# Altium PCB StepperMotorController.PcbDoc
Units mm, origin at the board's own origin, x right, y up, seen from the top; angles counter-clockwise.
Board outline 71.3 x 72.3 mm, 2 copper layers (Top Layer, Bottom Layer); 6 components, 26 nets, 99 pads, 6 vias.
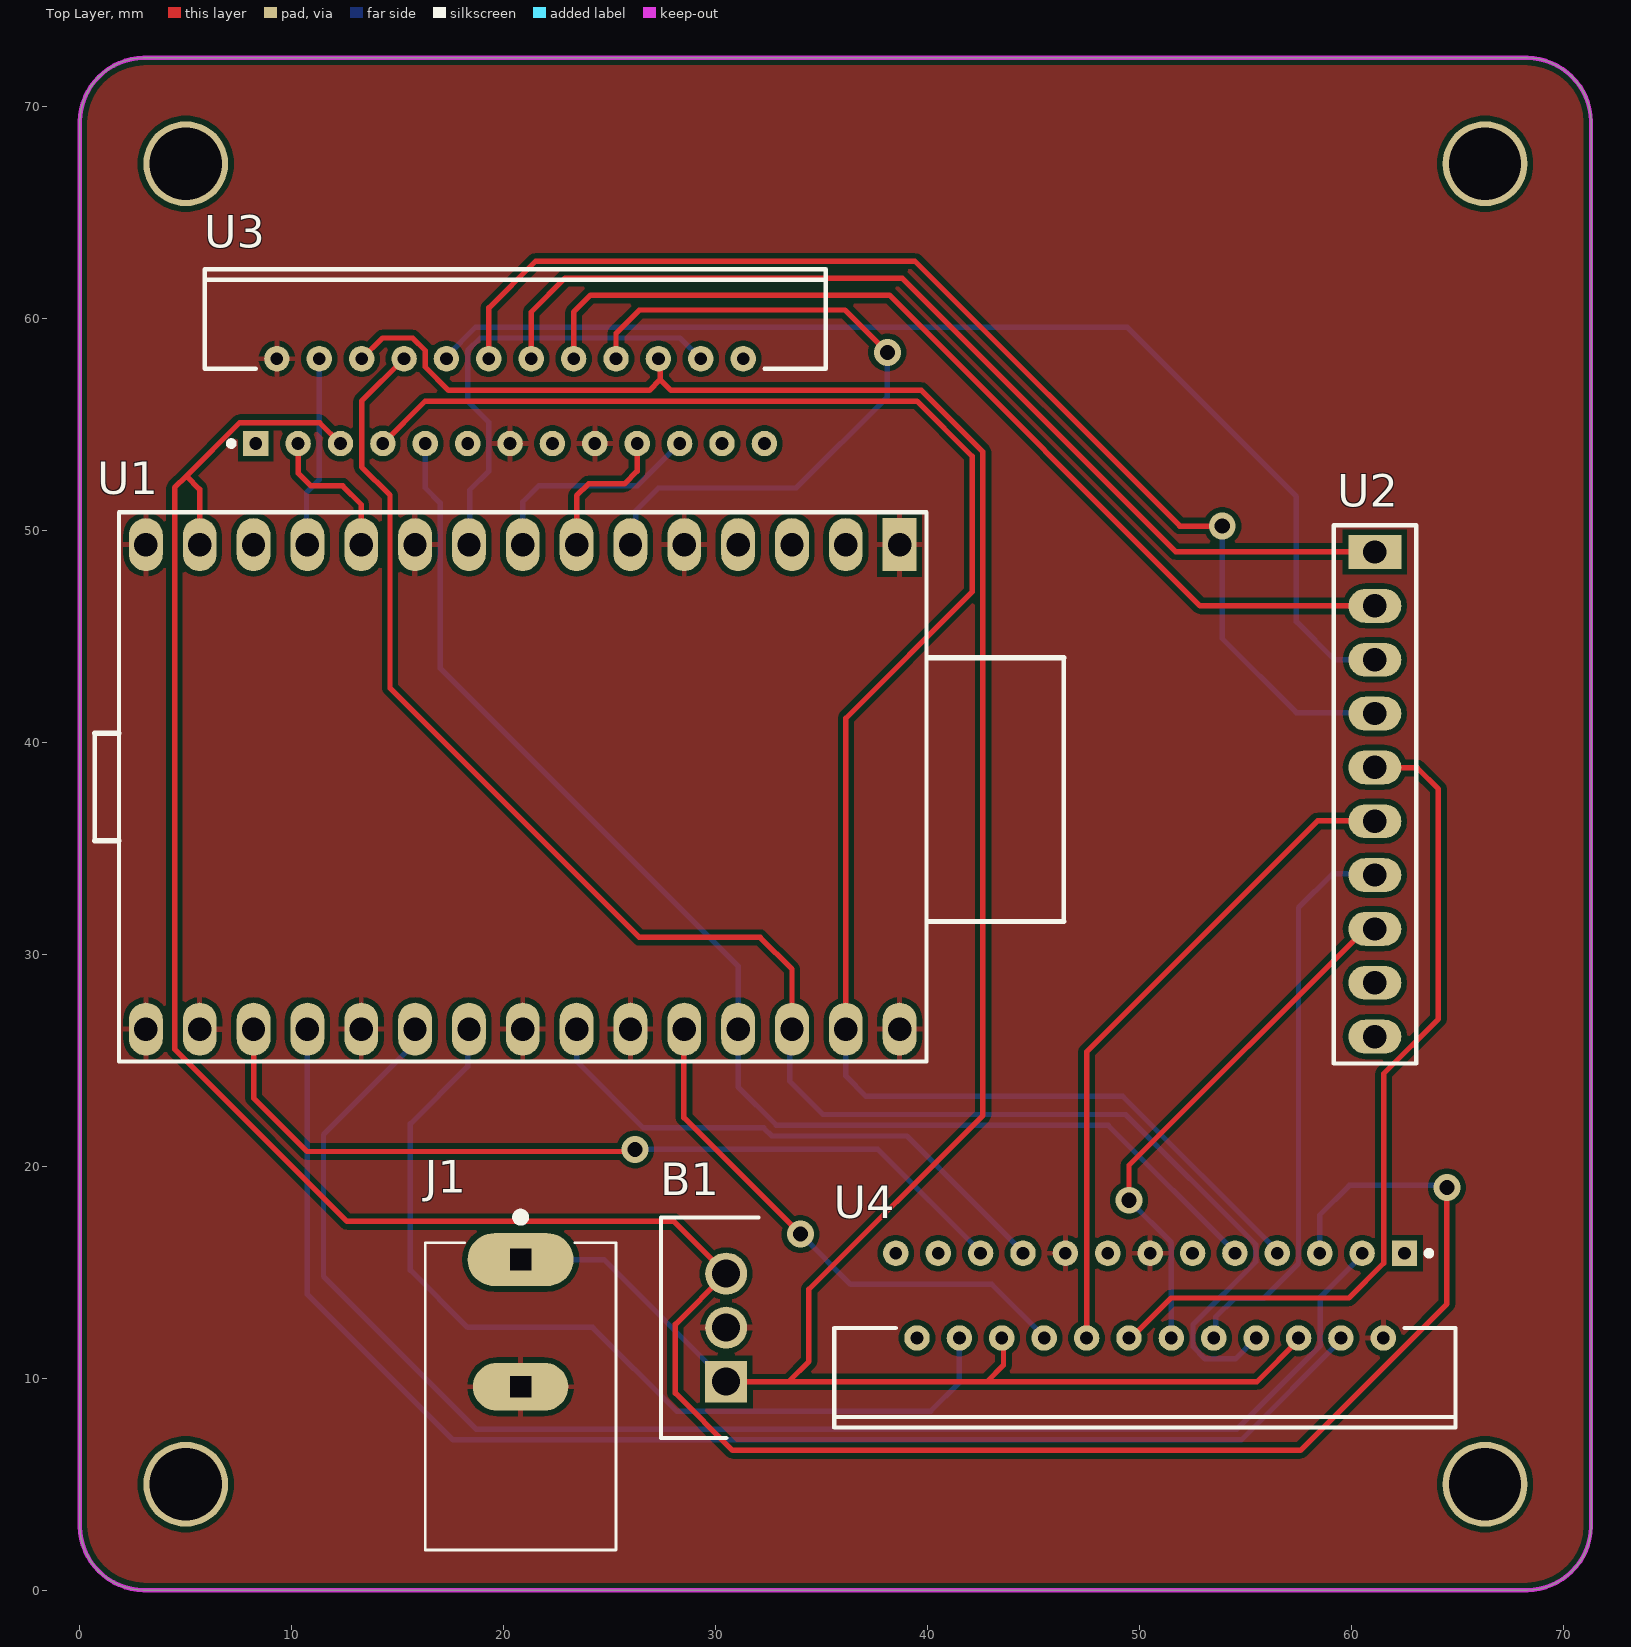
[diagram p0: Top Layer view]
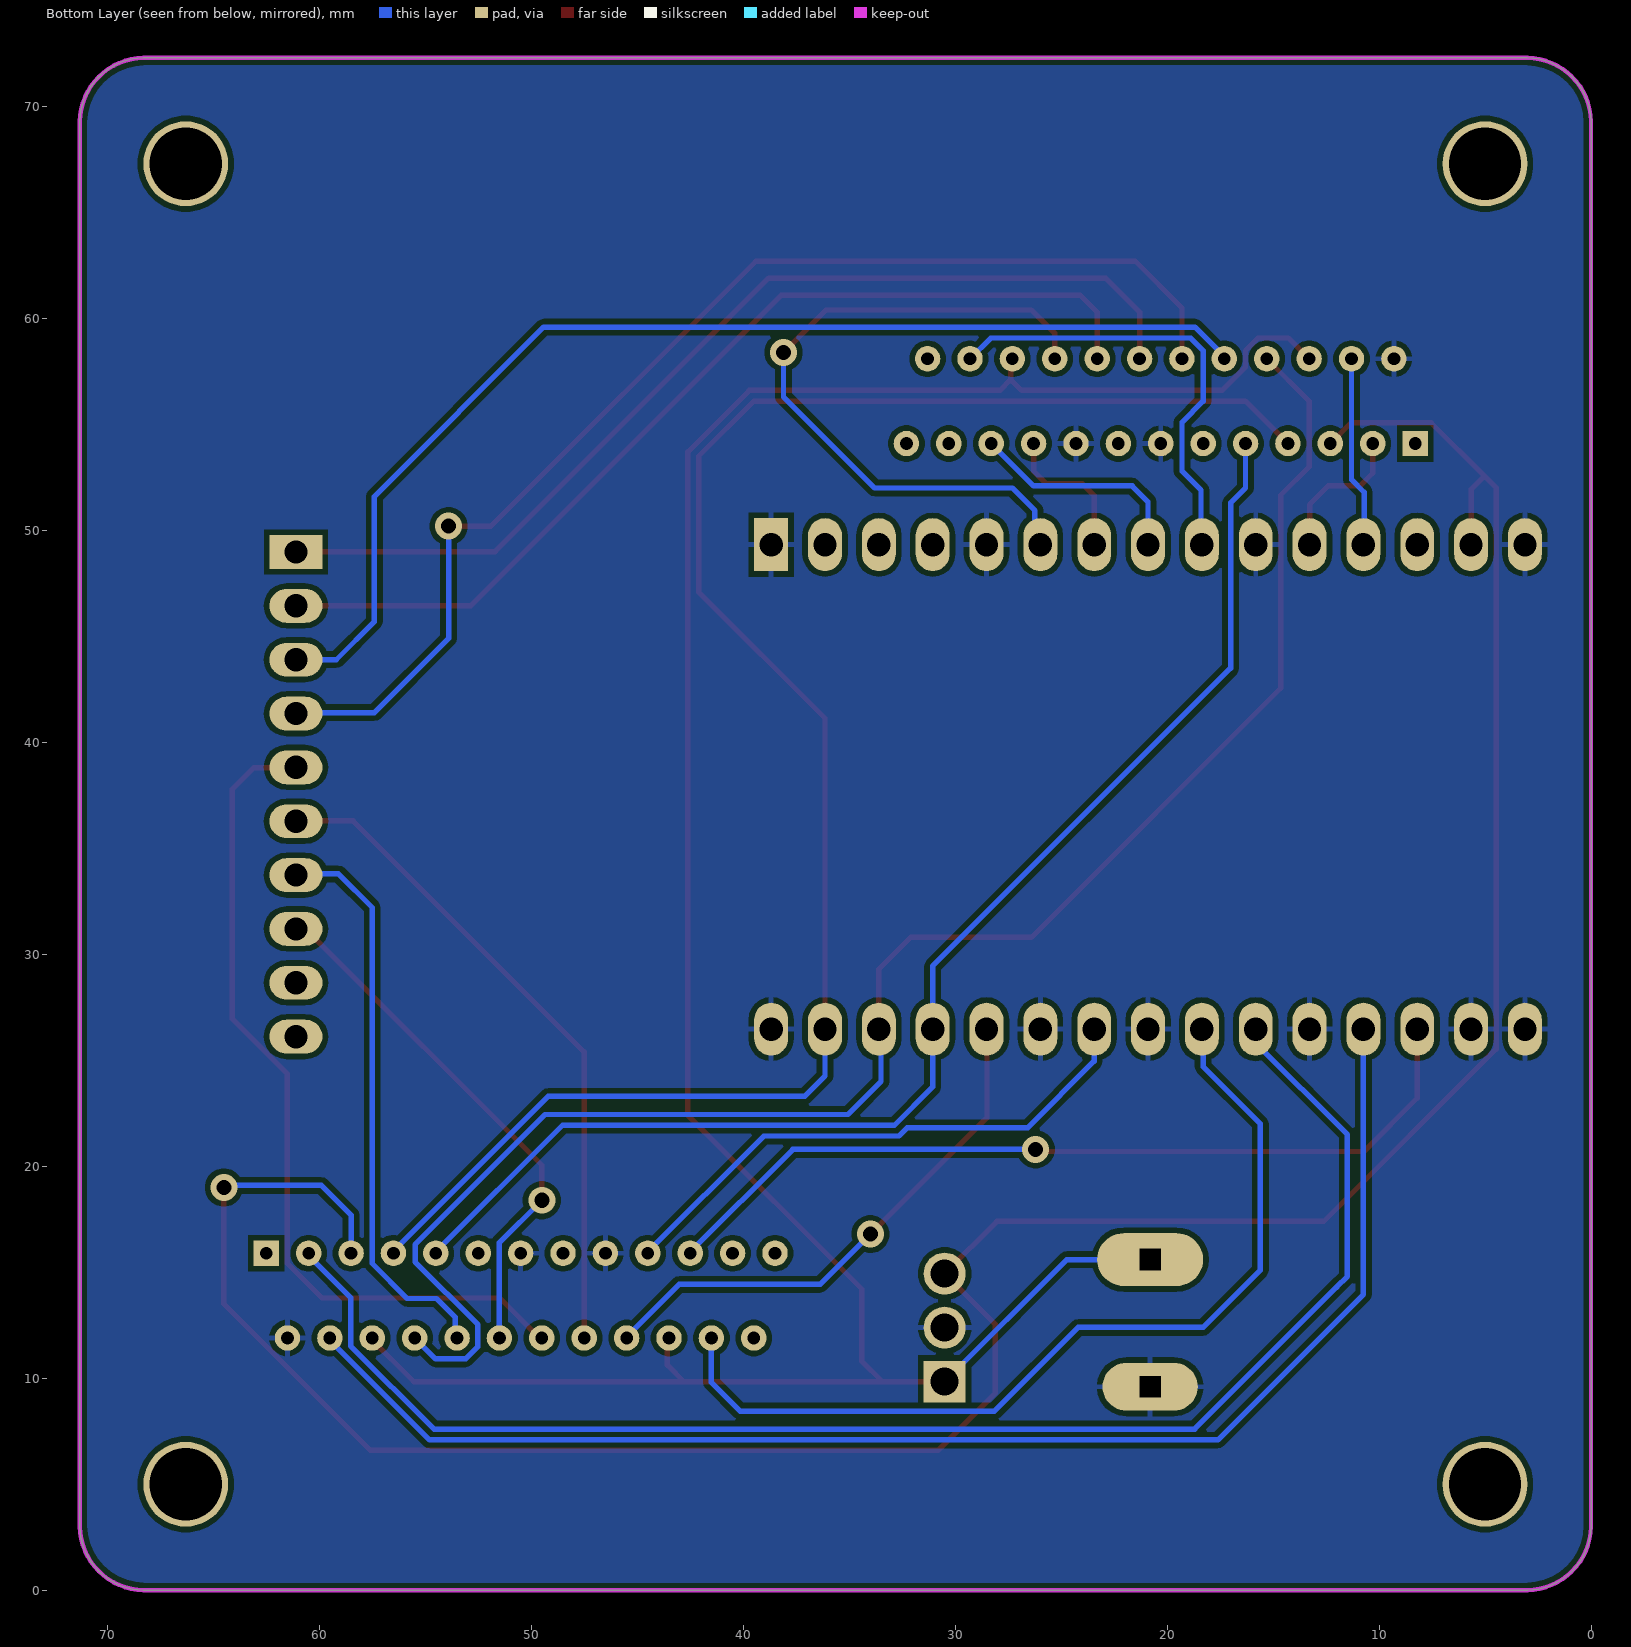
[diagram p1: Bottom Layer view, seen from below]
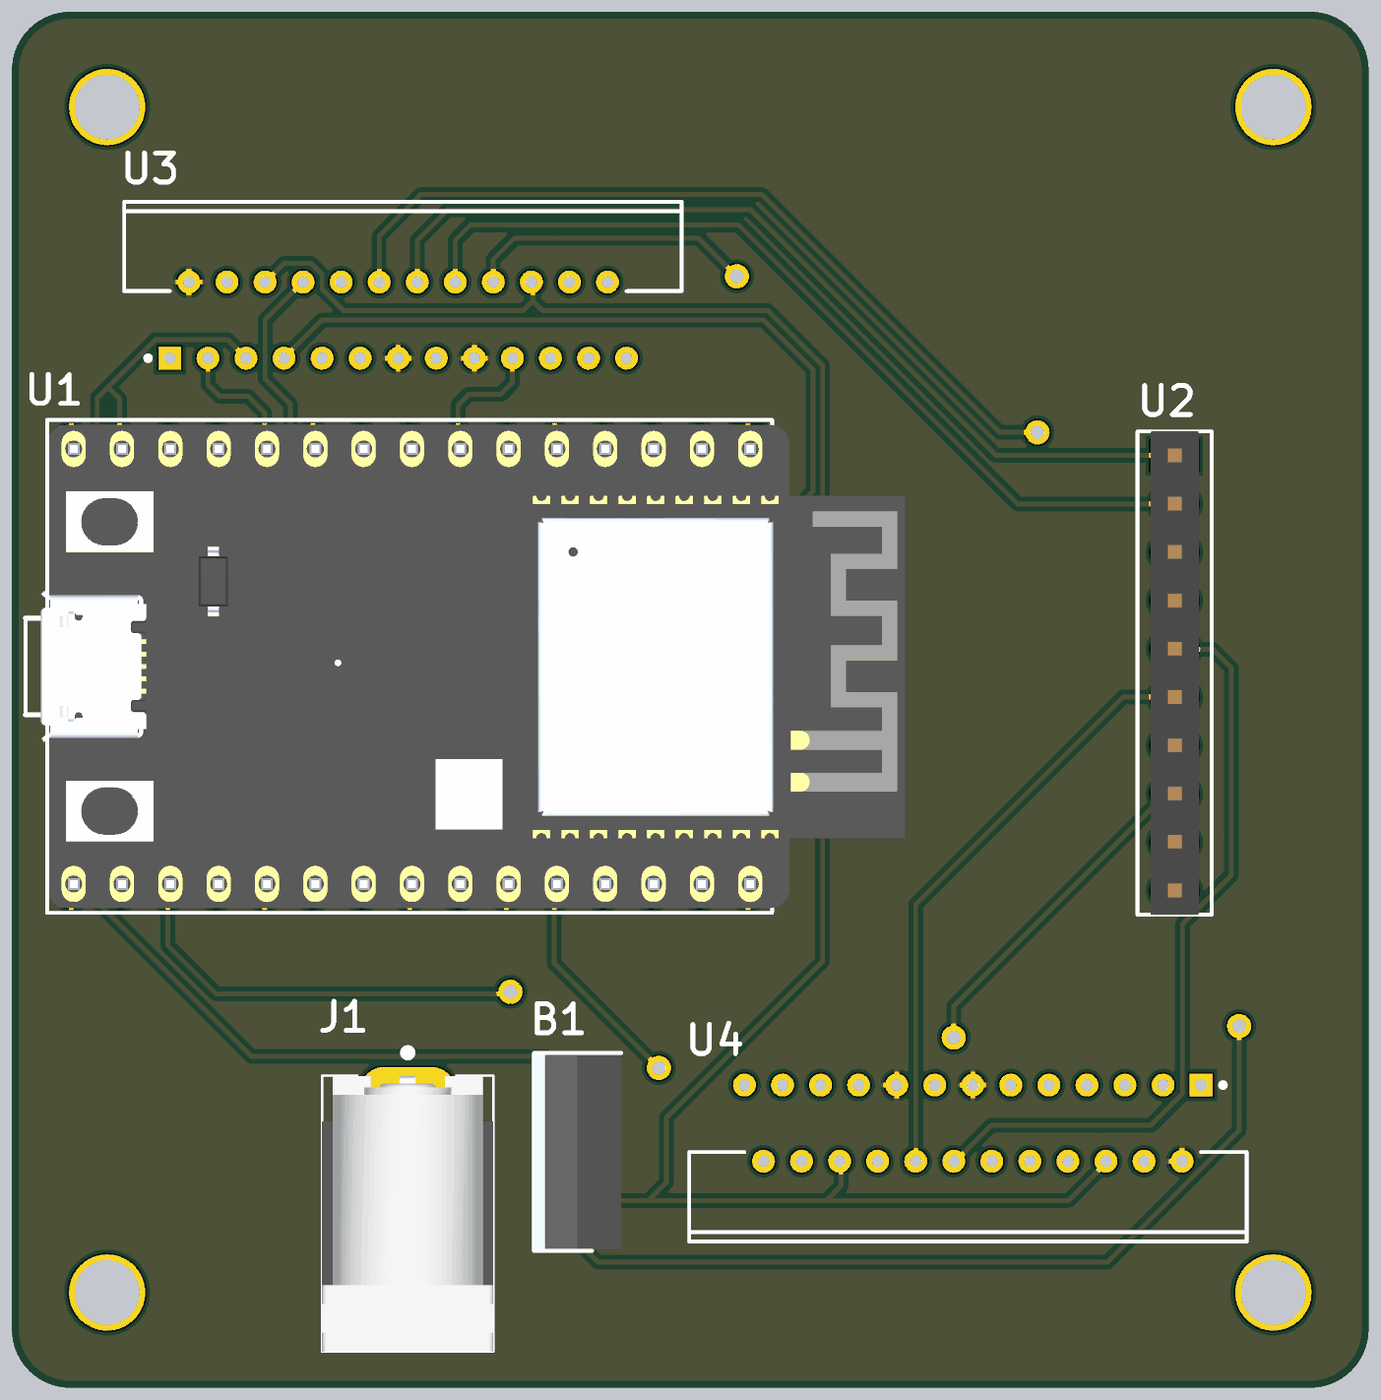
[diagram p2: 3D render of the assembled board from above, using the file's embedded part models]

## Layer stack, top to bottom
Top Solder: solder mask 0.0102, Solder Resist, Dk 3.5
Top Layer: signal copper 0.0356
Dielectric 1: dielectric 0.32, FR-4, Dk 4.8
Bottom Layer: signal copper 0.0356
Bottom Solder: solder mask 0.0102, Solder Resist, Dk 3.5

## Board outline
0,3 ccw(c3.067,3.067) 3,0 68.3,0 ccw(c68.233,3.067) 71.3,3 71.3,69.3 ccw(c68.233,69.233) 68.3,72.3 3,72.3 ccw(c3.067,69.233) 0,69.3

## Design rules (kind name [scope] priority, off if disabled: settings)
Clearance [All] p1: gap=0.254 ignorepadtopadclearanceinfootprint=FALSE
PolygonConnect [All] p1: connectstyle=Relief reliefconductorwidth=0.254 reliefentries=4 polygonreliefangle="90 Angle" airgapwidth=0.254
RoutingVias [All] p1: holewidth=0.711 width=1.27 viastyle="Through Hole" minholewidth=0.711 minwidth=1.27 maxholewidth=0.711 maxwidth=1.27
SolderMaskExpansion [All] p1: expansion=0.102 istentingtop=FALSE
Width [All] p1: maxlimit=0.254 minlimit=0.254 preferedwidth=0.254
30 further rules are at their usual default settings.

## Components (designator, comment, footprint, x,y, rotation, side; value= is the part's Value field where it differs from the comment)
B1 "L7805CV" TO255P460X1020X2008-3P 30.496,9.837 r90 top
J1 "PJ-037A" CUI_PJ-037A 20.8,15.6 r270 top
U1 "ESP32" ESP32 20.9,37.9 r270 top
U2 "Stackable Pin Bus" STACKABLE_PIN_BUS 61.1,37.55 r0 top
U3 "TB6600HG" TOSH-HZIP25-1.00F-25 20.55,56.1 r90 top
U4 "TB6600HG" TOSH-HZIP25-1.00F-25 50.25,13.9 r270 top

## Footprints (in the part's own frame and the unit in brackets; to place one, negate y for a bottom-side part, rotate by r counter-clockwise, add the part's x,y. Pads: shape width x height; smd on the part's side, far side on the other; paste and mask are expansions set on the pad)
CUI_PJ-037A [mm]
  oval 2.5x5 hole 1 square: 1(0,0)
  oval 2.25x4.5 hole 1 square: 2(6,0)
  silkscreen extent -2.2,-4.5 13.7,4.5, body extent -0.78,-4.5 13.72,4.5, height 11
ESP32 [mm]
  rect 2.5x1.6 hole 1.1: 1(-11.43,17.78)
  oval 2.5x1.6 hole 1.1: 2(-11.43,15.24) 3(-11.43,12.7) 4(-11.43,10.16) 5(-11.43,7.62) 6(-11.43,5.08) 7(-11.43,2.54) 8(-11.43,0) 9(-11.43,-2.54) 10(-11.43,-5.08) 11(-11.43,-7.62) 12(-11.43,-10.16) 13(-11.43,-12.7) 14(-11.43,-15.24) 15(-11.43,-17.78) 16(11.43,-17.78) 17(11.43,-15.24) 18(11.43,-12.7) 19(11.43,-10.16) 20(11.43,-7.62) 21(11.43,-5.08) 22(11.43,-2.54) 23(11.43,0) 24(11.43,2.54) 25(11.43,5.08) 26(11.43,7.62) 27(11.43,10.16) 28(11.43,12.7) 29(11.43,15.24) 30(11.43,17.78)
  silkscreen extent -12.95,-20.19 12.95,25.53, body extent -12.7,-19.39 12.7,26.03, height 7.49
STACKABLE_PIN_BUS [mm]
  rect 2.5x1.6 hole 1.1: 1(0,11.43)
  oval 2.5x1.6 hole 1.1: 2(0,8.89) 3(0,6.35) 4(0,3.81) 5(0,1.27) 6(0,-1.27) 7(0,-3.81) 8(0,-6.35) 9(0,-8.89) 10(0,-11.43)
  silkscreen extent -1.94,-12.7 1.95,12.7, body extent -1.25,-12.69 1.29,12.71, height 8
TO255P460X1020X2008-3P [mm]
  rect 1.98x1.98 / inner round 1.98 / far side rect 1.98x1.98 hole 1.32: 1(0,0)
  round 1.98 hole 1.32: 2(2.55,0) 3(5.1,0)
  silkscreen extent -2.65,-1.53 7.75,3.07, body extent -2.55,-1.53 7.65,3.07, height 19.22
TOSH-HZIP25-1.00F-25 [mm] "FM, 25-Leads, Body 4.5x29.3mm, Pitch 1mm"
  rect 1.2x1.2 hole 0.6: 1(-2,12.25)
  round 1.2 hole 0.6: 2(2,11.25) 3(-2,10.25) 4(2,9.25) 5(-2,8.25) 6(2,7.25) 7(-2,6.25) 8(2,5.25) 9(-2,4.25) 10(2,3.25) 11(-2,2.25) 12(2,1.25) 13(-2,0.25) 14(2,-0.75) 15(-2,-1.75) 16(2,-2.75) 17(-2,-3.75) 18(2,-4.75) 19(-2,-5.75) 20(2,-6.75) 21(-2,-7.75) 22(2,-8.75) 23(-2,-9.75) 24(2,-10.75) 25(-2,-11.75)
  silkscreen extent -2.12,-14.65 6.23,14.65, body extent -2.21,-14.65 6.2,14.65, height 19.37

## Part data
B1: "Linear voltage regulator,L7805CV 5V 1.5A STMicroelectronics L7805CV, Single Linear Voltage Regulator, 1.5A 5 V, 3-Pin TO-220", Manufacturer_Name=STMicroelectronics, Mouser Part Number=511-L7805CV, Datasheet Link=http://www.st.com/web/en/resource/technical/document/datasheet/CD00000444.pdf, Geometry.Height=4.6mm, Manufacturer_Part_Number=L7805CV, Mouser Price/Stock=https://www.mouser.co.uk/ProductDetail/STMicroelectronics/L7805CV?qs=9NrABl3fj%2FqplZAHiYUxWg%3D%3D
J1: "2.0 mm Center Pin, 2.5 A, Right Angle, Through Hole, Dc Power Jack Connector", Package=None, Availability=Unavailable, MP=PJ-037A, Price=None
U1: library part ESP32-C3-DEVKITC-02, Manufacturer="Espressif Systems", Supplier Part Number=1965-ESP32-C3-DEVKITC-02-ND, Category="RF Semiconductors and Devices", Manufacturer Part Number=ESP32-C3-DEVKITC-02, Pricing="1=8 (USD)", RoHS=No, Stock=1074, Supplier=Digikey
U2: library part "Barramento Empilhável", "10 pinos, Passo 2.54mm, Dimensões da barra 26x2x8mm"
U3: library part CMP-0695-00001-1, "PWM Chopper-Type Bipolar Stepping Motor Driver IC, 5.5 V Input Voltage, 4.5 A Output Current, -30 to 85 degC, 25-Pin FM (HZIP25-1.00F)", Clock Frequency (Max.)="200 KHz", Manufacturer=Toshiba, Operating Temperature="-30 to 85 degC", OSC Frequency="2.0 to 6.0 MHz", Output Current (Typ.)="4.5 A", Power Supply Voltage (Max.)="45 V", ComponentLink1Description="Manufacturer URL", ComponentLink1URL=http://www.toshiba-components.com/, ComponentLink2Description=Datasheet, ComponentLink2URL=http://www.toshiba-components.com/docs/linear/TB6600HG_en_datasheet.pdf, DatasheetVersion=Oct-13, Mounting Technology="Through Hole", PackageDescription="25-Pin HZIP25-P-1.00F, Body 4.5 x 29.3 mm, Pitch 1 mm", PackageReference=HZIP25-P-1.00F-25, PartNumber=TB6600HG, VIN (Typ.)="5.5 V"
U4: library part TB550HD, "PWM Chopper-Type Bipolar Stepping Motor Driver IC, 5.5 V Input Voltage, 4.5 A Output Current, -30 to 85 degC, 25-Pin FM (HZIP25-1.00F)", Clock Frequency (Max.)="200 KHz", Manufacturer=Toshiba, Operating Temperature="-30 to 85 degC", OSC Frequency="2.0 to 6.0 MHz", Output Current (Typ.)="4.5 A", Power Supply Voltage (Max.)="45 V", ComponentLink1Description="Manufacturer URL", ComponentLink1URL=http://www.toshiba-components.com/, ComponentLink2Description=Datasheet, ComponentLink2URL=http://www.toshiba-components.com/docs/linear/TB6600HG_en_datasheet.pdf, DatasheetVersion=Oct-13, Mounting Technology="Through Hole", PackageDescription="25-Pin HZIP25-P-1.00F, Body 4.5 x 29.3 mm, Pitch 1 mm", PackageReference=HZIP25-P-1.00F-25, PartNumber=TB6600HG, VIN (Typ.)="5.5 V"

## Free pads (board coordinates)
  round 4 hole 3.4: 3(5,5) 3(5,67.3) 3(66.3,5) 3(66.3,67.3)

## Via types
v1: diameter 1.27, hole 0.711, Top Layer to Bottom Layer, 6 vias

## Nets (pads, with @x,y where several pads share a name; then routed paths per layer and width w, separated by ;. In a path a pad name is that pad's centre, name@x,y a point inside that pad or via, vN(x,y) a via of type N, cw(c..) or ccw(c..) an arc to the next point about the centre after c; other vN are vias at no path point)
+5: B1.3 U1.14 U3.5 U4.5 | length 130.8
  Top Layer w0.254: U1.14 5.66,51.94 5.031,52.569 ; U3.5 11.319,55.081 7.542,55.081 5.031,52.569 ; v1(64.5,19) 64.5,13.513 57.587,6.6 30.8,6.6 28.1,9.3 28.1,12.541 B1.3 28.033,17.4 12.61,17.4 4.479,25.531 4.479,52.018 5.031,52.569
  Bottom Layer w0.254: U4.5 58.5,17.7 59.9,19.1 64.4,19.1 v1(64.5,19)
+12: B1.1 J1.1 U3.6 U3.20 U4.6 U4.20 | length 123.9
  Top Layer w0.254: U3.6 14.281,59.081 15.706,59.081 16.3,58.487 16.3,57.713 17.405,56.608 26.87,56.608 27.381,57.119 ; U3.20 27.381,58.019 27.381,57.119 ; B1.1 33.437,9.837 ; U4.20@43.578,11.879 43.578,10.622 42.793,9.837 ; U4.6@57.578,11.879 55.536,9.837 42.793,9.837 ; 27.381,57.119 27.892,56.608 39.71,56.608 42.608,53.71 42.608,22.408 34.4,14.2 34.4,10.8 33.437,9.837 ; 33.437,9.837 42.793,9.837
  Bottom Layer w0.254: J1.1 24.733,15.6 B1.1
CLK1: U1.8 U3.21 | length 10.6
  Bottom Layer w0.254: U1.8 20.9,51.351 21.649,52.1 26.3,52.1 U3.21
CLK2: U1.18 U4.21 | length 40.8
  Top Layer w0.254: U1.18 8.2,23.218 10.718,20.7 26.1,20.7 v1(26.2,20.8)
  Bottom Layer w0.254: v1(26.2,20.8) 37.657,20.8 U4.21@42.578,15.879
CW/CCW1: U1.9 U3.22 | length 21.6
  Bottom Layer w0.254: U1.9 18.4,49.37 18.4,51.9 19.3,52.8 19.3,55.1 18.3,56.1 18.3,58.487 18.894,59.081 28.319,59.081 U3.22
CW/CCW2: U1.22 U4.22 | length 44
  Bottom Layer w0.254: U1.22@18.5,26.33 U1.22 18.3,26.41 18.3,24.7 15.6,22 15.6,15.1 18.3,12.4 24.2,12.4 28.152,8.448 40.148,8.448 41.5,9.8 U4.22
ENABLE1: U1.6 U3.18 | length 33.2
  Top Layer w0.254: U3.18 25.3,59.3 26.4,60.4 36.1,60.4 v1(38.1,58.4) ; U1.6 U1.6@26.238,49.588
  Bottom Layer w0.254: U1.6@26.238,49.588 26.238,50.938 27.3,52 33.8,52 38.1,56.3 v1(38.1,58.4)
ENABLE2: U1.26 U4.18 | length 25.6
  Top Layer w0.254: U1.26 28.5,26.45 28.5,22.3 v1(34,16.8)
  Bottom Layer w0.254: v1(34,16.8) 36.37,14.43 43.027,14.43 U4.18@45.578,11.879
GND: B1.2 J1.2 U1.1 U1.5 U1.10 U1.15 U1.16 U1.17 U1.20 U1.23 U1.25 U1.30 U3.2 U3.13 U3.17 U4.2 U4.13 U4.17
LATCH1: U1.12 U3.4 | length 9
  Bottom Layer w0.254: U1.12 10.7,49.37 10.7,51.8 11.3,52.4 U3.4
LATCH2: U1.19 U4.4 | length 66.2
  Bottom Layer w0.254: U1.19 10.74,13.96 17.608,7.092 54.798,7.092 59.578,11.872 U4.4@59.578,11.879
M1: U1.29 U3.7 U4.7 | length 85.4
  Top Layer w0.254: U3.7 16.3,56.1 39.5,56.1 42.1,53.5 42.1,47.1 36.14,41.14 U1.29
  Bottom Layer w0.254: U1.29 36.14,24.26 37.1,23.3 49.206,23.3 56.578,15.928 U4.7@56.578,15.879
M2: U1.28 U3.8 U4.8 | length 81.6
  Top Layer w0.254: U3.8 13.3,56.1 13.3,53 14.639,51.661 14.639,42.561 26.4,30.8 32.1,30.8 33.6,29.3 U1.28
  Bottom Layer w0.254: U1.28 33.5,26.37 33.5,24 35.054,22.446 49.342,22.446 55.481,16.306 55.481,15.494 52.519,12.532 52.519,11.494 53.094,10.919 54.519,10.919 U4.8
M3: U1.27 U3.9 U4.9 | length 63.2
  Bottom Layer w0.254: U3.9 16.3,52 17,51.3 17,50.27 ; 17.001,50.269 17.001,43.501 31.06,29.442 U1.27 31.06,23.74 32.862,21.938 48.519,21.938 U4.9@54.578,15.879
O1A1: U2.2 U3.16 | length 46.4
  Top Layer w0.254: U3.16 23.3,60.3 24.1,61.1 38.2,61.1 52.86,46.44 U2.2
O1A2: U2.6 U4.16 | length 31.6
  Top Layer w0.254: U4.16 47.5,25.4 58.4,36.3 61.08,36.3 U2.6
O1B1: U2.4 U3.12 | length 57.1
  Top Layer w0.254: U3.12 19.3,60.5 21.5,62.7 39.4,62.7 51.9,50.2 v1(53.9,50.2)
  Bottom Layer w0.254: v1(53.9,50.2) 53.9,44.9 57.4,41.4 61.06,41.4 U2.4
O1B2: U2.8 U4.12 | length 25.2
  Top Layer w0.254: v1(49.5,18.4) 49.5,20.05 60.65,31.2 U2.8
  Bottom Layer w0.254: v1(49.5,18.4) 51.5,16.4 U4.12
O2A1: U2.1 U3.14 | length 48
  Top Layer w0.254: U3.14 21.3,60.3 22.9,61.9 38.8,61.9 51.7,49 61.08,49 U2.1
O2A2: U2.5 U4.14 | length 40.3
  Top Layer w0.254: U4.14@49.578,11.879 51.484,13.785 59.872,13.785 61.519,15.433 61.519,24.376 64.1,26.957 64.1,37.8 63.1,38.8 61.12,38.8 U2.5
O2B1: U2.3 U3.10 | length 54.4
  Bottom Layer w0.254: U3.10 17.3,58.206 18.683,59.589 49.411,59.589 57.4,51.6 57.4,45.7 59.2,43.9 U2.3
O2B2: U2.7 U4.10 | length 27.1
  Bottom Layer w0.254: U4.10 53.587,11.987 53.587,12.881 54.472,13.766 55.853,13.766 57.5,15.414 57.5,32.2 59.1,33.8 61.04,33.8 U2.7
RESET1: U1.7 U3.19 | length 7
  Top Layer w0.254: U1.7 23.44,51.64 24,52.2 25.7,52.2 26.3,52.8 U3.19
RESET2: U1.24 U4.19 | length 26.4
  Bottom Layer w0.254: U1.24 23.44,24.96 26.584,21.816 32.266,21.816 32.652,21.43 39.027,21.43 U4.19@44.578,15.879
TQ1: U1.11 U3.3 | length 6.9
  Top Layer w0.254: U3.3 10.3,52.7 10.9,52.1 12.4,52.1 13.28,51.22 U1.11
TQ2: U1.21 U4.3 | length 70.3
  Bottom Layer w0.254: U1.21 15.82,25.82 11.5,21.5 11.5,14.8 12,14.3 18.7,7.6 54.587,7.6 58.519,11.532 58.519,13.813 60.5,15.794 U4.3
pads on no net: U1.2 U1.3 U1.4 U1.13 U2.9 U2.10 U3.1 U3.11 U3.15 U3.23 U3.24 U3.25 U4.1 U4.11 U4.15 U4.23 U4.24 U4.25

## Polygon pours and split planes (outlines as drawn)
GND on Top Layer "GND_L01_P002" (solid, pour order 2): 0,0 0,72.3 71.3,72.3 71.3,0
GND on Bottom Layer "GND_L02_P003" (solid, pour order 3): 0,0 0,72.3 71.3,72.3 71.3,0

## Keep-outs
Keep-Out Layer:
  the board outline again, w0.2